# Altium PCB Ender-3.PcbDoc (part 6 of 14)
Units mil, origin at the board's own origin, x right, y up, seen from the top; angles counter-clockwise.
Board outline 3970.48 x 2769.68 mil, 2 copper layers (TopLayer, BottomLayer); 146 components, 136 nets, 669 pads, 614 vias.
Unrouted connection lines stored in the file: 1.
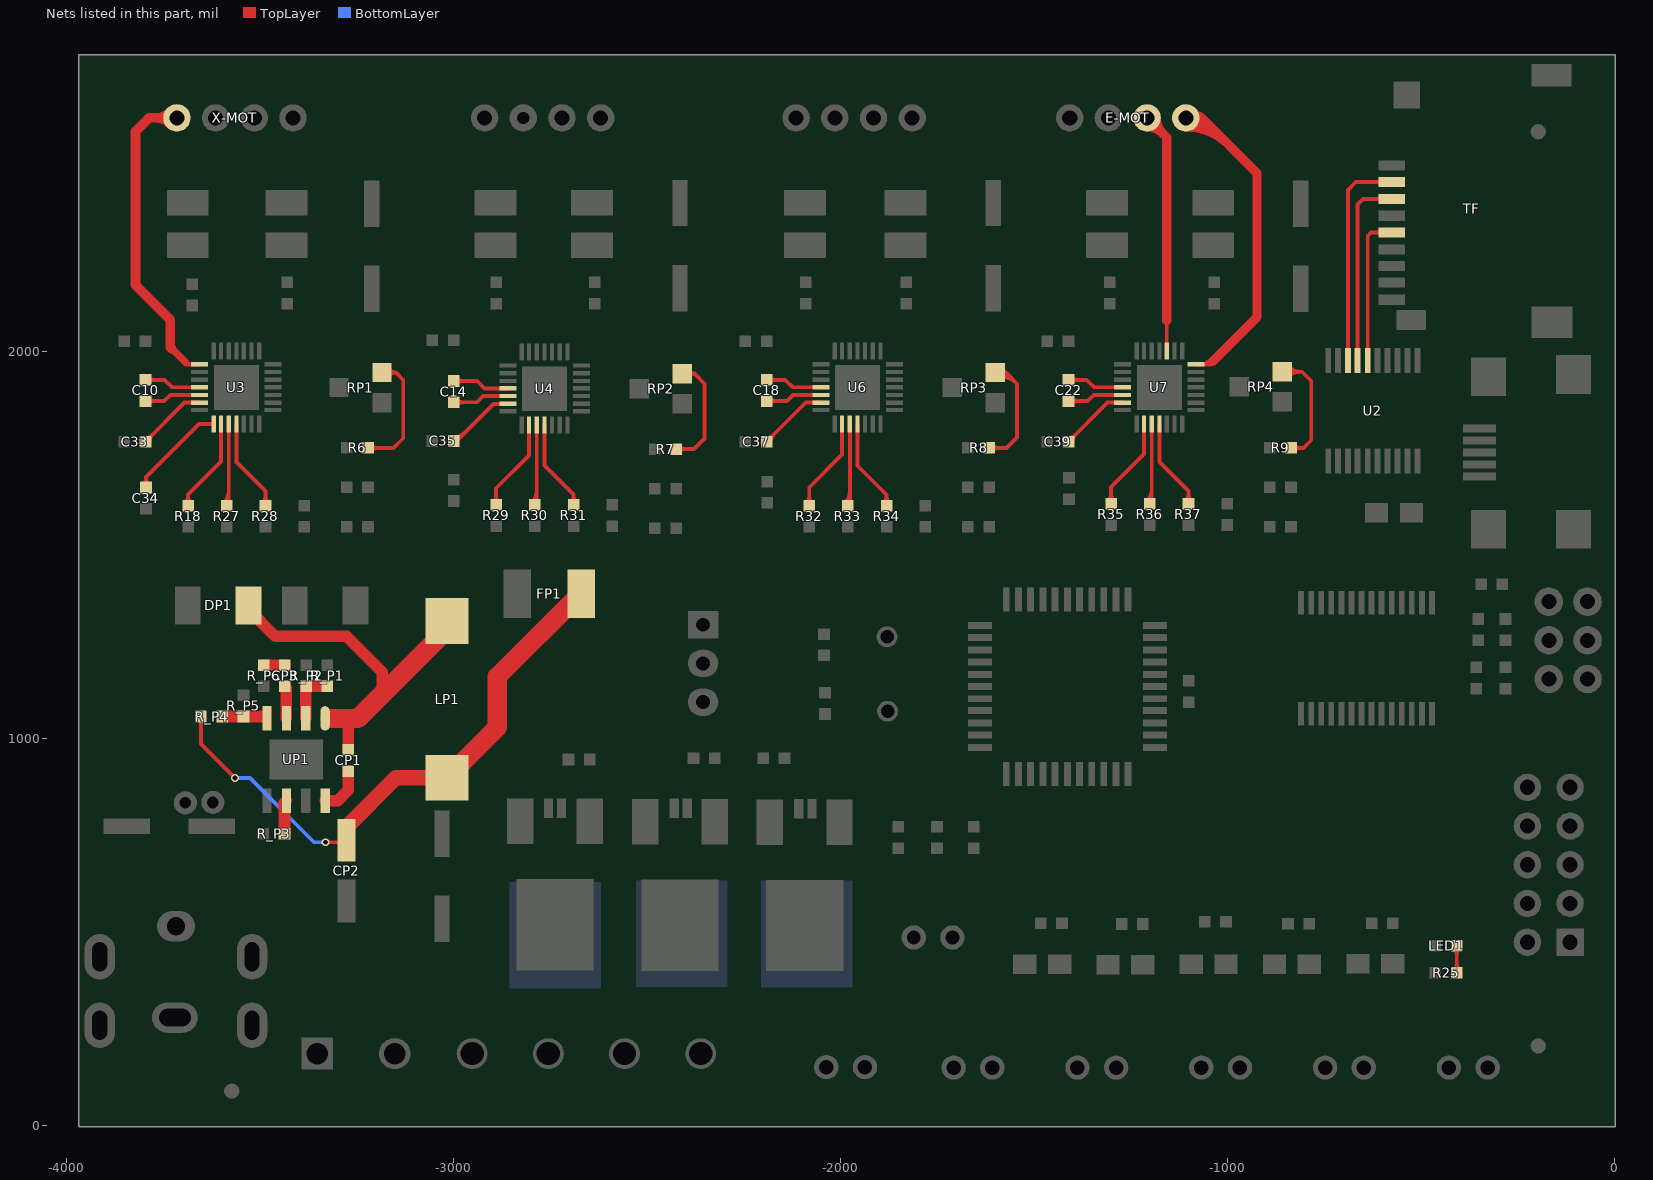
[diagram p6: the nets of this part, all layers, seen from the top]

## Via types
v1: diameter 28, hole 18, TopLayer to BottomLayer, tented both sides, 246 vias
v2: diameter 27.56, hole 19.68, TopLayer to BottomLayer, tented both sides, 196 vias
v3: diameter 20, hole 12, TopLayer to BottomLayer, tented both sides, 124 vias
v4: diameter 27.56, hole 11.81, TopLayer to BottomLayer, tented bottom, 16 vias
v5: diameter 27.56, hole 19.68, TopLayer to BottomLayer, 16 vias
v6: diameter 20, hole 12, TopLayer to BottomLayer, 12 vias
v7: diameter 28, hole 11.81, TopLayer to BottomLayer, tented both sides, 4 vias

## Nets (pads, with @x,y where several pads share a name; then routed paths per layer and width w, separated by ;. In a path a pad name is that pad's centre, name@x,y a point inside that pad or via, vN(x,y) a via of type N, cw(c..) or ccw(c..) an arc to the next point about the centre after c; other vN are vias at no path point) (continued)
NetC10_1: C10.1 U3.4 | length 489.2
  TopLayer w10: C10.1@-3795.62,1927.88 -3746.54,1927.88 -3727.54,1908.88 U3.4@-3655.62,1908.88 ; C10.1@-3788.55,1920.81 cw(c-3771.48,1903.74) -3771.48,1927.88 ; C10.1@-3788.55,1920.81 cw(c-3771.48,1903.74) -3771.48,1927.88 ; C10.1@-3788.55,1920.81 cw(c-3771.48,1903.74) -3771.48,1927.88 ; C10.1@-3788.55,1920.81 cw(c-3771.48,1903.74) -3771.48,1927.88 ; C10.1@-3788.55,1920.81 cw(c-3771.48,1903.74) -3771.48,1927.88 ; C10.1@-3788.55,1920.81 cw(c-3771.48,1903.74) -3771.48,1927.88 ; C10.1@-3788.55,1920.81 cw(c-3771.48,1903.74) -3771.48,1927.88 ; C10.1@-3788.55,1920.81 cw(c-3771.48,1903.74) -3771.48,1927.88 ; C10.1@-3788.55,1920.81 cw(c-3771.48,1903.74) -3771.48,1927.88 ; C10.1@-3788.55,1934.95 ccw(c-3771.48,1952.02) -3771.48,1927.88 ; C10.1@-3788.55,1934.95 ccw(c-3771.48,1952.02) -3771.48,1927.88 ; C10.1@-3788.55,1934.95 ccw(c-3771.48,1952.02) -3771.48,1927.88 ; C10.1@-3788.55,1934.95 ccw(c-3771.48,1952.02) -3771.48,1927.88 ; C10.1@-3788.55,1934.95 ccw(c-3771.48,1952.02) -3771.48,1927.88 ; C10.1@-3788.55,1934.95 ccw(c-3771.48,1952.02) -3771.48,1927.88 ; C10.1@-3788.55,1934.95 ccw(c-3771.48,1952.02) -3771.48,1927.88 ; C10.1@-3788.55,1934.95 ccw(c-3771.48,1952.02) -3771.48,1927.88 ; C10.1@-3788.55,1934.95 ccw(c-3771.48,1952.02) -3771.48,1927.88
NetC10_2: C10.2 U3.5 | length 487.9
  TopLayer w10: C10.2@-3795.62,1872.88 -3747.54,1872.88 -3731.54,1888.88 U3.5@-3655.62,1888.88 ; C10.2@-3788.55,1865.81 cw(c-3771.48,1848.74) -3771.48,1872.88 ; C10.2@-3788.55,1865.81 cw(c-3771.48,1848.74) -3771.48,1872.88 ; C10.2@-3788.55,1865.81 cw(c-3771.48,1848.74) -3771.48,1872.88 ; C10.2@-3788.55,1865.81 cw(c-3771.48,1848.74) -3771.48,1872.88 ; C10.2@-3788.55,1865.81 cw(c-3771.48,1848.74) -3771.48,1872.88 ; C10.2@-3788.55,1865.81 cw(c-3771.48,1848.74) -3771.48,1872.88 ; C10.2@-3788.55,1865.81 cw(c-3771.48,1848.74) -3771.48,1872.88 ; C10.2@-3788.55,1865.81 cw(c-3771.48,1848.74) -3771.48,1872.88 ; C10.2@-3788.55,1865.81 cw(c-3771.48,1848.74) -3771.48,1872.88 ; C10.2@-3788.55,1879.95 ccw(c-3771.48,1897.02) -3771.48,1872.88 ; C10.2@-3788.55,1879.95 ccw(c-3771.48,1897.02) -3771.48,1872.88 ; C10.2@-3788.55,1879.95 ccw(c-3771.48,1897.02) -3771.48,1872.88 ; C10.2@-3788.55,1879.95 ccw(c-3771.48,1897.02) -3771.48,1872.88 ; C10.2@-3788.55,1879.95 ccw(c-3771.48,1897.02) -3771.48,1872.88 ; C10.2@-3788.55,1879.95 ccw(c-3771.48,1897.02) -3771.48,1872.88 ; C10.2@-3788.55,1879.95 ccw(c-3771.48,1897.02) -3771.48,1872.88 ; C10.2@-3788.55,1879.95 ccw(c-3771.48,1897.02) -3771.48,1872.88 ; C10.2@-3788.55,1879.95 ccw(c-3771.48,1897.02) -3771.48,1872.88
NetC14_1: C14.1 U4.4 | length 489.2
  TopLayer w10: C14.1@-2999.54,1924.84 -2938.54,1924.84 -2919.54,1905.84 U4.4@-2859.54,1905.84 ; C14.1@-2992.46,1917.77 cw(c-2975.39,1900.7) -2975.39,1924.84 ; C14.1@-2992.46,1917.77 cw(c-2975.39,1900.7) -2975.39,1924.84 ; C14.1@-2992.46,1917.77 cw(c-2975.39,1900.7) -2975.39,1924.84 ; C14.1@-2992.46,1917.77 cw(c-2975.39,1900.7) -2975.39,1924.84 ; C14.1@-2992.46,1917.77 cw(c-2975.39,1900.7) -2975.39,1924.84 ; C14.1@-2992.46,1917.77 cw(c-2975.39,1900.7) -2975.39,1924.84 ; C14.1@-2992.46,1917.77 cw(c-2975.39,1900.7) -2975.39,1924.84 ; C14.1@-2992.46,1917.77 cw(c-2975.39,1900.7) -2975.39,1924.84 ; C14.1@-2992.46,1917.77 cw(c-2975.39,1900.7) -2975.39,1924.84 ; C14.1@-2992.46,1931.91 ccw(c-2975.39,1948.98) -2975.39,1924.84 ; C14.1@-2992.46,1931.91 ccw(c-2975.39,1948.98) -2975.39,1924.84 ; C14.1@-2992.46,1931.91 ccw(c-2975.39,1948.98) -2975.39,1924.84 ; C14.1@-2992.46,1931.91 ccw(c-2975.39,1948.98) -2975.39,1924.84 ; C14.1@-2992.46,1931.91 ccw(c-2975.39,1948.98) -2975.39,1924.84 ; C14.1@-2992.46,1931.91 ccw(c-2975.39,1948.98) -2975.39,1924.84 ; C14.1@-2992.46,1931.91 ccw(c-2975.39,1948.98) -2975.39,1924.84 ; C14.1@-2992.46,1931.91 ccw(c-2975.39,1948.98) -2975.39,1924.84 ; C14.1@-2992.46,1931.91 ccw(c-2975.39,1948.98) -2975.39,1924.84
NetC14_2: C14.2 U4.5 | length 487.9
  TopLayer w10: C14.2@-2999.54,1869.84 -2939.54,1869.84 -2923.54,1885.84 U4.5@-2859.54,1885.84 ; C14.2@-2992.46,1862.77 cw(c-2975.39,1845.7) -2975.39,1869.84 ; C14.2@-2992.46,1862.77 cw(c-2975.39,1845.7) -2975.39,1869.84 ; C14.2@-2992.46,1862.77 cw(c-2975.39,1845.7) -2975.39,1869.84 ; C14.2@-2992.46,1862.77 cw(c-2975.39,1845.7) -2975.39,1869.84 ; C14.2@-2992.46,1862.77 cw(c-2975.39,1845.7) -2975.39,1869.84 ; C14.2@-2992.46,1862.77 cw(c-2975.39,1845.7) -2975.39,1869.84 ; C14.2@-2992.46,1862.77 cw(c-2975.39,1845.7) -2975.39,1869.84 ; C14.2@-2992.46,1862.77 cw(c-2975.39,1845.7) -2975.39,1869.84 ; C14.2@-2992.46,1862.77 cw(c-2975.39,1845.7) -2975.39,1869.84 ; C14.2@-2992.46,1876.91 ccw(c-2975.39,1893.98) -2975.39,1869.84 ; C14.2@-2992.46,1876.91 ccw(c-2975.39,1893.98) -2975.39,1869.84 ; C14.2@-2992.46,1876.91 ccw(c-2975.39,1893.98) -2975.39,1869.84 ; C14.2@-2992.46,1876.91 ccw(c-2975.39,1893.98) -2975.39,1869.84 ; C14.2@-2992.46,1876.91 ccw(c-2975.39,1893.98) -2975.39,1869.84 ; C14.2@-2992.46,1876.91 ccw(c-2975.39,1893.98) -2975.39,1869.84 ; C14.2@-2992.46,1876.91 ccw(c-2975.39,1893.98) -2975.39,1869.84 ; C14.2@-2992.46,1876.91 ccw(c-2975.39,1893.98) -2975.39,1869.84 ; C14.2@-2992.46,1876.91 ccw(c-2975.39,1893.98) -2975.39,1869.84
NetC18_1: C18.1 U6.4 | length 489.2
  TopLayer w10: C18.1@-2190.62,1927.88 -2142.57,1927.88 -2123.57,1908.88 U6.4@-2050.62,1908.88 ; C18.1@-2183.55,1920.81 cw(c-2166.48,1903.74) -2166.48,1927.88 ; C18.1@-2183.55,1920.81 cw(c-2166.48,1903.74) -2166.48,1927.88 ; C18.1@-2183.55,1920.81 cw(c-2166.48,1903.74) -2166.48,1927.88 ; C18.1@-2183.55,1920.81 cw(c-2166.48,1903.74) -2166.48,1927.88 ; C18.1@-2183.55,1920.81 cw(c-2166.48,1903.74) -2166.48,1927.88 ; C18.1@-2183.55,1920.81 cw(c-2166.48,1903.74) -2166.48,1927.88 ; C18.1@-2183.55,1920.81 cw(c-2166.48,1903.74) -2166.48,1927.88 ; C18.1@-2183.55,1920.81 cw(c-2166.48,1903.74) -2166.48,1927.88 ; C18.1@-2183.55,1920.81 cw(c-2166.48,1903.74) -2166.48,1927.88 ; C18.1@-2183.55,1934.95 ccw(c-2166.48,1952.02) -2166.48,1927.88 ; C18.1@-2183.55,1934.95 ccw(c-2166.48,1952.02) -2166.48,1927.88 ; C18.1@-2183.55,1934.95 ccw(c-2166.48,1952.02) -2166.48,1927.88 ; C18.1@-2183.55,1934.95 ccw(c-2166.48,1952.02) -2166.48,1927.88 ; C18.1@-2183.55,1934.95 ccw(c-2166.48,1952.02) -2166.48,1927.88 ; C18.1@-2183.55,1934.95 ccw(c-2166.48,1952.02) -2166.48,1927.88 ; C18.1@-2183.55,1934.95 ccw(c-2166.48,1952.02) -2166.48,1927.88 ; C18.1@-2183.55,1934.95 ccw(c-2166.48,1952.02) -2166.48,1927.88 ; C18.1@-2183.55,1934.95 ccw(c-2166.48,1952.02) -2166.48,1927.88
NetC18_2: C18.2 U6.5 | length 487.9
  TopLayer w10: C18.2@-2190.62,1872.88 -2138.5,1872.88 -2122.5,1888.88 U6.5@-2050.62,1888.88 ; C18.2@-2183.55,1865.81 cw(c-2166.48,1848.74) -2166.48,1872.88 ; C18.2@-2183.55,1865.81 cw(c-2166.48,1848.74) -2166.48,1872.88 ; C18.2@-2183.55,1865.81 cw(c-2166.48,1848.74) -2166.48,1872.88 ; C18.2@-2183.55,1865.81 cw(c-2166.48,1848.74) -2166.48,1872.88 ; C18.2@-2183.55,1865.81 cw(c-2166.48,1848.74) -2166.48,1872.88 ; C18.2@-2183.55,1865.81 cw(c-2166.48,1848.74) -2166.48,1872.88 ; C18.2@-2183.55,1865.81 cw(c-2166.48,1848.74) -2166.48,1872.88 ; C18.2@-2183.55,1865.81 cw(c-2166.48,1848.74) -2166.48,1872.88 ; C18.2@-2183.55,1865.81 cw(c-2166.48,1848.74) -2166.48,1872.88 ; C18.2@-2183.55,1879.95 ccw(c-2166.48,1897.02) -2166.48,1872.88 ; C18.2@-2183.55,1879.95 ccw(c-2166.48,1897.02) -2166.48,1872.88 ; C18.2@-2183.55,1879.95 ccw(c-2166.48,1897.02) -2166.48,1872.88 ; C18.2@-2183.55,1879.95 ccw(c-2166.48,1897.02) -2166.48,1872.88 ; C18.2@-2183.55,1879.95 ccw(c-2166.48,1897.02) -2166.48,1872.88 ; C18.2@-2183.55,1879.95 ccw(c-2166.48,1897.02) -2166.48,1872.88 ; C18.2@-2183.55,1879.95 ccw(c-2166.48,1897.02) -2166.48,1872.88 ; C18.2@-2183.55,1879.95 ccw(c-2166.48,1897.02) -2166.48,1872.88 ; C18.2@-2183.55,1879.95 ccw(c-2166.48,1897.02) -2166.48,1872.88
NetC22_1: C22.1 U7.4 | length 489.2
  TopLayer w10: C22.1@-1410.62,1927.88 -1363.57,1927.88 -1344.57,1908.88 U7.4@-1270.62,1908.88 ; C22.1@-1403.55,1920.81 cw(c-1386.48,1903.74) -1386.48,1927.88 ; C22.1@-1403.55,1920.81 cw(c-1386.48,1903.74) -1386.48,1927.88 ; C22.1@-1403.55,1920.81 cw(c-1386.48,1903.74) -1386.48,1927.88 ; C22.1@-1403.55,1920.81 cw(c-1386.48,1903.74) -1386.48,1927.88 ; C22.1@-1403.55,1920.81 cw(c-1386.48,1903.74) -1386.48,1927.88 ; C22.1@-1403.55,1920.81 cw(c-1386.48,1903.74) -1386.48,1927.88 ; C22.1@-1403.55,1920.81 cw(c-1386.48,1903.74) -1386.48,1927.88 ; C22.1@-1403.55,1920.81 cw(c-1386.48,1903.74) -1386.48,1927.88 ; C22.1@-1403.55,1920.81 cw(c-1386.48,1903.74) -1386.48,1927.88 ; C22.1@-1403.55,1934.95 ccw(c-1386.48,1952.02) -1386.48,1927.88 ; C22.1@-1403.55,1934.95 ccw(c-1386.48,1952.02) -1386.48,1927.88 ; C22.1@-1403.55,1934.95 ccw(c-1386.48,1952.02) -1386.48,1927.88 ; C22.1@-1403.55,1934.95 ccw(c-1386.48,1952.02) -1386.48,1927.88 ; C22.1@-1403.55,1934.95 ccw(c-1386.48,1952.02) -1386.48,1927.88 ; C22.1@-1403.55,1934.95 ccw(c-1386.48,1952.02) -1386.48,1927.88 ; C22.1@-1403.55,1934.95 ccw(c-1386.48,1952.02) -1386.48,1927.88 ; C22.1@-1403.55,1934.95 ccw(c-1386.48,1952.02) -1386.48,1927.88 ; C22.1@-1403.55,1934.95 ccw(c-1386.48,1952.02) -1386.48,1927.88
NetC22_2: C22.2 U7.5 | length 487.9
  TopLayer w10: C22.2@-1410.62,1872.88 -1361.5,1872.88 -1345.5,1888.88 U7.5@-1270.62,1888.88 ; C22.2@-1403.55,1865.81 cw(c-1386.48,1848.74) -1386.48,1872.88 ; C22.2@-1403.55,1865.81 cw(c-1386.48,1848.74) -1386.48,1872.88 ; C22.2@-1403.55,1865.81 cw(c-1386.48,1848.74) -1386.48,1872.88 ; C22.2@-1403.55,1865.81 cw(c-1386.48,1848.74) -1386.48,1872.88 ; C22.2@-1403.55,1865.81 cw(c-1386.48,1848.74) -1386.48,1872.88 ; C22.2@-1403.55,1865.81 cw(c-1386.48,1848.74) -1386.48,1872.88 ; C22.2@-1403.55,1865.81 cw(c-1386.48,1848.74) -1386.48,1872.88 ; C22.2@-1403.55,1865.81 cw(c-1386.48,1848.74) -1386.48,1872.88 ; C22.2@-1403.55,1865.81 cw(c-1386.48,1848.74) -1386.48,1872.88 ; C22.2@-1403.55,1879.95 ccw(c-1386.48,1897.02) -1386.48,1872.88 ; C22.2@-1403.55,1879.95 ccw(c-1386.48,1897.02) -1386.48,1872.88 ; C22.2@-1403.55,1879.95 ccw(c-1386.48,1897.02) -1386.48,1872.88 ; C22.2@-1403.55,1879.95 ccw(c-1386.48,1897.02) -1386.48,1872.88 ; C22.2@-1403.55,1879.95 ccw(c-1386.48,1897.02) -1386.48,1872.88 ; C22.2@-1403.55,1879.95 ccw(c-1386.48,1897.02) -1386.48,1872.88 ; C22.2@-1403.55,1879.95 ccw(c-1386.48,1897.02) -1386.48,1872.88 ; C22.2@-1403.55,1879.95 ccw(c-1386.48,1897.02) -1386.48,1872.88 ; C22.2@-1403.55,1879.95 ccw(c-1386.48,1897.02) -1386.48,1872.88
NetC32_2: 
NetC33_1: C33.1 U3.6 | length 525.1
  TopLayer w10: C33.1@-3793.62,1767.88 C33.1@-3795.62,1767.88 -3694.62,1868.88 U3.6@-3655.62,1868.88 ; C33.1@-3795.62,1777.88 ccw(c-3795.62,1802.02) -3778.55,1784.95 ; C33.1@-3795.62,1777.88 ccw(c-3795.62,1802.02) -3778.55,1784.95 ; C33.1@-3795.62,1777.88 ccw(c-3795.62,1802.02) -3778.55,1784.95 ; C33.1@-3795.62,1777.88 ccw(c-3795.62,1802.02) -3778.55,1784.95 ; C33.1@-3795.62,1777.88 ccw(c-3795.62,1802.02) -3778.55,1784.95 ; C33.1@-3795.62,1777.88 ccw(c-3795.62,1802.02) -3778.55,1784.95 ; C33.1@-3795.62,1777.88 ccw(c-3795.62,1802.02) -3778.55,1784.95 ; C33.1@-3795.62,1777.88 ccw(c-3795.62,1802.02) -3778.55,1784.95 ; C33.1@-3795.62,1777.88 ccw(c-3795.62,1802.02) -3778.55,1784.95 ; C33.1@-3785.62,1767.88 cw(c-3761.48,1767.88) -3778.55,1784.95 ; C33.1@-3785.62,1767.88 cw(c-3761.48,1767.88) -3778.55,1784.95 ; C33.1@-3785.62,1767.88 cw(c-3761.48,1767.88) -3778.55,1784.95 ; C33.1@-3785.62,1767.88 cw(c-3761.48,1767.88) -3778.55,1784.95 ; C33.1@-3785.62,1767.88 cw(c-3761.48,1767.88) -3778.55,1784.95 ; C33.1@-3785.62,1767.88 cw(c-3761.48,1767.88) -3778.55,1784.95 ; C33.1@-3785.62,1767.88 cw(c-3761.48,1767.88) -3778.55,1784.95 ; C33.1@-3785.62,1767.88 cw(c-3761.48,1767.88) -3778.55,1784.95 ; C33.1@-3785.62,1767.88 cw(c-3761.48,1767.88) -3778.55,1784.95
NetC35_1: C35.1 U4.6 | length 469.9
  TopLayer w10: C35.1@-2999.54,1769.84 -2992.54,1769.84 -2896.54,1865.84 U4.6@-2859.54,1865.84 ; C35.1@-2999.54,1779.84 ccw(c-2999.54,1820.88) -2970.51,1791.86 ; C35.1@-2999.54,1779.84 ccw(c-2999.54,1820.88) -2970.51,1791.86 ; C35.1@-2999.54,1779.84 ccw(c-2999.54,1820.88) -2970.51,1791.86 ; C35.1@-2999.54,1779.84 ccw(c-2999.54,1820.88) -2970.51,1791.86 ; C35.1@-2999.54,1779.84 ccw(c-2999.54,1820.88) -2970.51,1791.86 ; C35.1@-2999.54,1779.84 ccw(c-2999.54,1820.88) -2970.51,1791.86 ; C35.1@-2999.54,1779.84 ccw(c-2999.54,1820.88) -2970.51,1791.86 ; C35.1@-2999.54,1779.84 ccw(c-2999.54,1820.88) -2970.51,1791.86 ; C35.1@-2999.54,1779.84 ccw(c-2999.54,1820.88) -2970.51,1791.86
NetC37_1: C37.1 U6.6 | length 523.1
  TopLayer w10: C37.1@-2190.62,1767.88 -2089.62,1868.88 U6.6@-2050.62,1868.88 ; C37.1@-2190.62,1777.88 ccw(c-2190.62,1802.02) -2173.55,1784.95 ; C37.1@-2190.62,1777.88 ccw(c-2190.62,1802.02) -2173.55,1784.95 ; C37.1@-2190.62,1777.88 ccw(c-2190.62,1802.02) -2173.55,1784.95 ; C37.1@-2190.62,1777.88 ccw(c-2190.62,1802.02) -2173.55,1784.95 ; C37.1@-2190.62,1777.88 ccw(c-2190.62,1802.02) -2173.55,1784.95 ; C37.1@-2190.62,1777.88 ccw(c-2190.62,1802.02) -2173.55,1784.95 ; C37.1@-2190.62,1777.88 ccw(c-2190.62,1802.02) -2173.55,1784.95 ; C37.1@-2190.62,1777.88 ccw(c-2190.62,1802.02) -2173.55,1784.95 ; C37.1@-2190.62,1777.88 ccw(c-2190.62,1802.02) -2173.55,1784.95 ; C37.1@-2180.62,1767.88 cw(c-2156.48,1767.88) -2173.55,1784.95 ; C37.1@-2180.62,1767.88 cw(c-2156.48,1767.88) -2173.55,1784.95 ; C37.1@-2180.62,1767.88 cw(c-2156.48,1767.88) -2173.55,1784.95 ; C37.1@-2180.62,1767.88 cw(c-2156.48,1767.88) -2173.55,1784.95 ; C37.1@-2180.62,1767.88 cw(c-2156.48,1767.88) -2173.55,1784.95 ; C37.1@-2180.62,1767.88 cw(c-2156.48,1767.88) -2173.55,1784.95 ; C37.1@-2180.62,1767.88 cw(c-2156.48,1767.88) -2173.55,1784.95 ; C37.1@-2180.62,1767.88 cw(c-2156.48,1767.88) -2173.55,1784.95 ; C37.1@-2180.62,1767.88 cw(c-2156.48,1767.88) -2173.55,1784.95
NetC39_1: C39.1 U7.6 | length 523.1
  TopLayer w10: C39.1@-1410.62,1767.88 -1309.62,1868.88 U7.6@-1270.62,1868.88 ; C39.1@-1410.62,1777.88 ccw(c-1410.62,1802.02) -1393.55,1784.95 ; C39.1@-1410.62,1777.88 ccw(c-1410.62,1802.02) -1393.55,1784.95 ; C39.1@-1410.62,1777.88 ccw(c-1410.62,1802.02) -1393.55,1784.95 ; C39.1@-1410.62,1777.88 ccw(c-1410.62,1802.02) -1393.55,1784.95 ; C39.1@-1410.62,1777.88 ccw(c-1410.62,1802.02) -1393.55,1784.95 ; C39.1@-1410.62,1777.88 ccw(c-1410.62,1802.02) -1393.55,1784.95 ; C39.1@-1410.62,1777.88 ccw(c-1410.62,1802.02) -1393.55,1784.95 ; C39.1@-1410.62,1777.88 ccw(c-1410.62,1802.02) -1393.55,1784.95 ; C39.1@-1410.62,1777.88 ccw(c-1410.62,1802.02) -1393.55,1784.95 ; C39.1@-1400.62,1767.88 cw(c-1376.48,1767.88) -1393.55,1784.95 ; C39.1@-1400.62,1767.88 cw(c-1376.48,1767.88) -1393.55,1784.95 ; C39.1@-1400.62,1767.88 cw(c-1376.48,1767.88) -1393.55,1784.95 ; C39.1@-1400.62,1767.88 cw(c-1376.48,1767.88) -1393.55,1784.95 ; C39.1@-1400.62,1767.88 cw(c-1376.48,1767.88) -1393.55,1784.95 ; C39.1@-1400.62,1767.88 cw(c-1376.48,1767.88) -1393.55,1784.95 ; C39.1@-1400.62,1767.88 cw(c-1376.48,1767.88) -1393.55,1784.95 ; C39.1@-1400.62,1767.88 cw(c-1376.48,1767.88) -1393.55,1784.95 ; C39.1@-1400.62,1767.88 cw(c-1376.48,1767.88) -1393.55,1784.95
NetCP1_1: CP1.1 UP1.8 | length 120.3
  TopLayer w30: UP1.8@-3331.54,840.54 -3298.83,840.54 -3271.54,867.84 CP1.1@-3271.54,916.84
NetCP1_2: CP1.2 DP1.2 LP1.2 UP1.1 | length 969.9
  TopLayer w30: DP1.2@-3529.06,1344.84 -3529.06,1333.36 -3460.54,1264.84 -3275.54,1264.84 -3183.54,1172.84 -3183.54,1115.84 ; CP1.2@-3271.54,971.84 -3271.54,1041.84
  TopLayer w50: -3318.54,1052.84 -3246.54,1052.84 -3183.54,1115.84 -3016.54,1282.84 LP1.2@-3016.54,1304.96
NetCP2_1: CP2.1 FP1.1 LP1.1 R_P4.2 | length 1512.6
  TopLayer w10: R_P4.2@-3652.54,1057.84 -3652.54,986.84 v3(-3564.54,898.84) ; v3(-3330.54,732.84) CP2.1@-3282.28,732.84
  TopLayer w40: CP2.1@-3276.54,738.58 -3276.54,771.84 -3148.54,899.84 LP1.1@-3016.54,899.84
  TopLayer w50: LP1.1@-3016.54,899.84 -2886.54,1029.84 -2886.54,1160.46 -2672,1375 FP1.1@-2670,1375
  BottomLayer w10: v3(-3564.54,898.84) -3525.54,898.84 -3359.54,732.84 v3(-3330.54,732.84)
NetCP3_1: CP3.1 R_P6.1 | length 55
  TopLayer w30: R_P6.1@-3490.54,1190.84 CP3.1@-3435.54,1190.84
NetCP3_2: CP3.2 UP1.3 | length 78.7
  TopLayer w30: UP1.3@-3431.54,1053.14 CP3.2@-3431.54,1131.84
NetE-MOT_3: E-MOT.3 U7.24 | length 1056.2
  TopLayer w10: U7.24@-1156.62,2017.56 -1156.62,2080.84
  TopLayer w23.62: E-MOT.3@-1207.49,2604.84 -1156.62,2553.98 -1156.62,2442.84 -1156.62,2080.84 ; E-MOT.3@-1207.49,2581.22 cw(c-1207.49,2524.19) -1167.16,2564.52 ; E-MOT.3@-1207.49,2581.22 cw(c-1207.49,2524.19) -1167.16,2564.52 ; E-MOT.3@-1207.49,2581.22 cw(c-1207.49,2524.19) -1167.16,2564.52 ; E-MOT.3@-1207.49,2581.22 cw(c-1207.49,2524.19) -1167.16,2564.52 ; E-MOT.3@-1207.49,2581.22 cw(c-1207.49,2524.19) -1167.16,2564.52 ; E-MOT.3@-1183.87,2604.84 ccw(c-1126.84,2604.84) -1167.16,2564.52 ; E-MOT.3@-1183.87,2604.84 ccw(c-1126.84,2604.84) -1167.16,2564.52 ; E-MOT.3@-1183.87,2604.84 ccw(c-1126.84,2604.84) -1167.16,2564.52 ; E-MOT.3@-1183.87,2604.84 ccw(c-1126.84,2604.84) -1167.16,2564.52 ; E-MOT.3@-1183.87,2604.84 ccw(c-1126.84,2604.84) -1167.16,2564.52
NetE-MOT_4: E-MOT.4 U7.21 | length 2198.1
  TopLayer w10: U7.21@-1080.62,1967.88 -1044.54,1967.88 ccw(c-1045.02,1978.23) -1034.67,1978.71 ; -1056.54,1967.88 cw(c-1044.05,1962.36) -1038.54,1974.84
  TopLayer w23.62: E-MOT.4@-1092.47,2586.61 cw(c-1070.5,2559.93) -1046.06,2584.37 ; -1064.46,2602.77 ccw(c-1087.12,2580.11) E-MOT.4@-1107.49,2604.84 ; -1038.54,1974.84 -923.54,2089.84 -923.54,2413.84 -923.54,2461.84 -1066.54,2604.84 ; E-MOT.4@-1107.49,2581.22 cw(c-1107.49,2425.32) -997.25,2535.56 ; E-MOT.4@-1107.49,2581.22 cw(c-1107.49,2425.32) -997.25,2535.56 ; E-MOT.4@-1107.49,2581.22 cw(c-1107.49,2425.32) -997.25,2535.56 ; E-MOT.4@-1107.49,2581.22 cw(c-1107.49,2425.32) -997.25,2535.56 ; E-MOT.4@-1107.49,2581.22 cw(c-1107.49,2425.32) -997.25,2535.56 ; E-MOT.4@-1107.49,2604.84 cw(c-1107.49,2505.97) -1037.58,2575.88 ; E-MOT.4@-1107.49,2604.84 cw(c-1107.49,2505.97) -1037.58,2575.88 ; E-MOT.4@-1107.49,2604.84 cw(c-1107.49,2505.97) -1037.58,2575.88 ; E-MOT.4@-1107.49,2604.84 cw(c-1107.49,2505.97) -1037.58,2575.88 ; E-MOT.4@-1107.49,2604.84 cw(c-1107.49,2505.97) -1037.58,2575.88 ; E-MOT.4@-1107.49,2604.84 -1066.54,2604.84 ; E-MOT.4@-1087.04,2593.02 cw(c-1066.54,2581.16) -1066.54,2604.84 ; E-MOT.4@-1087.04,2593.02 cw(c-1066.54,2581.16) -1066.54,2604.84 ; E-MOT.4@-1087.04,2593.02 cw(c-1066.54,2581.16) -1066.54,2604.84 ; E-MOT.4@-1087.04,2593.02 cw(c-1066.54,2581.16) -1066.54,2604.84 ; E-MOT.4@-1087.04,2593.02 cw(c-1066.54,2581.16) -1066.54,2604.84 ; E-MOT.4@-1087.04,2616.67 ccw(c-1066.54,2628.53) -1066.54,2604.84 ; E-MOT.4@-1087.04,2616.67 ccw(c-1066.54,2628.53) -1066.54,2604.84 ; E-MOT.4@-1087.04,2616.67 ccw(c-1066.54,2628.53) -1066.54,2604.84 ; E-MOT.4@-1087.04,2616.67 ccw(c-1066.54,2628.53) -1066.54,2604.84 ; E-MOT.4@-1087.04,2616.67 ccw(c-1066.54,2628.53) -1066.54,2604.84
NetL1_2: LED1.2 R25.1 | length 221.7
  TopLayer w10: R25.1@-407.54,395.84 LED1.2@-407.54,465.84 ; -407.54,419.98 cw(c-431.68,419.98) -414.61,402.91 ccw(c-431.68,419.98) -407.54,419.98 ; -407.54,419.98 ccw(c-383.39,419.98) -400.46,402.91 cw(c-383.39,419.98) -407.54,419.98 ; -407.54,441.7 cw(c-383.39,441.7) -400.46,458.77 ccw(c-383.39,441.7) -407.54,441.7 ; -407.54,441.7 ccw(c-431.68,441.7) -414.61,458.77 cw(c-431.68,441.7) -407.54,441.7
NetR18_1: R18.1 U3.9 | length 576
  TopLayer w10: R18.1@-3685.62,1602.88 -3685.62,1631.76 -3600.62,1716.76 -3600.62,1776.88 ; U3.9@-3600.62,1795.97 -3600.62,1776.97 -3600.54,1776.88 ; U3.9@-3600.62,1813.88 -3600.62,1807.64 U3.9@-3600.54,1807.55 ; R18.1@-3692.69,1609.95 ccw(c-3709.76,1627.02) -3685.62,1627.02 ; R18.1@-3692.69,1609.95 ccw(c-3709.76,1627.02) -3685.62,1627.02 ; R18.1@-3692.69,1609.95 ccw(c-3709.76,1627.02) -3685.62,1627.02 ; R18.1@-3692.69,1609.95 ccw(c-3709.76,1627.02) -3685.62,1627.02 ; R18.1@-3692.69,1609.95 ccw(c-3709.76,1627.02) -3685.62,1627.02 ; R18.1@-3692.69,1609.95 ccw(c-3709.76,1627.02) -3685.62,1627.02 ; R18.1@-3692.69,1609.95 ccw(c-3709.76,1627.02) -3685.62,1627.02 ; R18.1@-3692.69,1609.95 ccw(c-3709.76,1627.02) -3685.62,1627.02 ; R18.1@-3692.69,1609.95 ccw(c-3709.76,1627.02) -3685.62,1627.02 ; -3685.62,1627.02 ccw(c-3661.48,1627.02) R18.1@-3678.55,1609.95 ; -3685.62,1627.02 ccw(c-3661.48,1627.02) R18.1@-3678.55,1609.95 ; -3685.62,1627.02 ccw(c-3661.48,1627.02) R18.1@-3678.55,1609.95 ; -3685.62,1627.02 ccw(c-3661.48,1627.02) R18.1@-3678.55,1609.95 ; -3685.62,1627.02 ccw(c-3661.48,1627.02) R18.1@-3678.55,1609.95 ; -3685.62,1627.02 ccw(c-3661.48,1627.02) R18.1@-3678.55,1609.95 ; -3685.62,1627.02 ccw(c-3661.48,1627.02) R18.1@-3678.55,1609.95 ; -3685.62,1627.02 ccw(c-3661.48,1627.02) R18.1@-3678.55,1609.95 ; -3685.62,1627.02 ccw(c-3661.48,1627.02) R18.1@-3678.55,1609.95
NetR27_1: R27.1 U3.10 | length 504.4
  TopLayer w10: R27.1@-3585.62,1602.88 -3580.62,1607.88 U3.10@-3580.62,1813.88 ; R27.1@-3592.69,1609.95 ccw(c-3621.84,1639.09) -3580.62,1639.09 ; R27.1@-3592.69,1609.95 ccw(c-3621.84,1639.09) -3580.62,1639.09 ; R27.1@-3592.69,1609.95 ccw(c-3621.84,1639.09) -3580.62,1639.09 ; R27.1@-3592.69,1609.95 ccw(c-3621.84,1639.09) -3580.62,1639.09 ; R27.1@-3592.69,1609.95 ccw(c-3621.84,1639.09) -3580.62,1639.09 ; R27.1@-3592.69,1609.95 ccw(c-3621.84,1639.09) -3580.62,1639.09 ; R27.1@-3592.69,1609.95 ccw(c-3621.84,1639.09) -3580.62,1639.09 ; R27.1@-3592.69,1609.95 ccw(c-3621.84,1639.09) -3580.62,1639.09 ; R27.1@-3592.69,1609.95 ccw(c-3621.84,1639.09) -3580.62,1639.09
NetR28_1: R28.1 U3.11 | length 583.4
  TopLayer w10: U3.11@-3560.62,1813.88 -3560.62,1715.84 -3485.62,1640.84 R28.1@-3485.62,1602.88 ; R28.1@-3492.69,1609.95 ccw(c-3509.76,1627.02) -3485.62,1627.02 ; R28.1@-3492.69,1609.95 ccw(c-3509.76,1627.02) -3485.62,1627.02 ; R28.1@-3492.69,1609.95 ccw(c-3509.76,1627.02) -3485.62,1627.02 ; R28.1@-3492.69,1609.95 ccw(c-3509.76,1627.02) -3485.62,1627.02 ; R28.1@-3492.69,1609.95 ccw(c-3509.76,1627.02) -3485.62,1627.02 ; R28.1@-3492.69,1609.95 ccw(c-3509.76,1627.02) -3485.62,1627.02 ; R28.1@-3492.69,1609.95 ccw(c-3509.76,1627.02) -3485.62,1627.02 ; R28.1@-3492.69,1609.95 ccw(c-3509.76,1627.02) -3485.62,1627.02 ; R28.1@-3492.69,1609.95 ccw(c-3509.76,1627.02) -3485.62,1627.02 ; -3485.62,1627.02 ccw(c-3461.48,1627.02) R28.1@-3478.55,1609.95 ; -3485.62,1627.02 ccw(c-3461.48,1627.02) R28.1@-3478.55,1609.95 ; -3485.62,1627.02 ccw(c-3461.48,1627.02) R28.1@-3478.55,1609.95 ; -3485.62,1627.02 ccw(c-3461.48,1627.02) R28.1@-3478.55,1609.95 ; -3485.62,1627.02 ccw(c-3461.48,1627.02) R28.1@-3478.55,1609.95 ; -3485.62,1627.02 ccw(c-3461.48,1627.02) R28.1@-3478.55,1609.95 ; -3485.62,1627.02 ccw(c-3461.48,1627.02) R28.1@-3478.55,1609.95 ; -3485.62,1627.02 ccw(c-3461.48,1627.02) R28.1@-3478.55,1609.95 ; -3485.62,1627.02 ccw(c-3461.48,1627.02) R28.1@-3478.55,1609.95
NetR29_1: R29.1 U4.9 | length 582.5
  TopLayer w10: R29.1@-2889.54,1604.84 -2889.54,1647.84 -2804.54,1732.84 U4.9@-2804.54,1810.84 ; R29.1@-2896.61,1611.91 ccw(c-2913.68,1628.98) -2889.54,1628.98 ; R29.1@-2896.61,1611.91 ccw(c-2913.68,1628.98) -2889.54,1628.98 ; R29.1@-2896.61,1611.91 ccw(c-2913.68,1628.98) -2889.54,1628.98 ; R29.1@-2896.61,1611.91 ccw(c-2913.68,1628.98) -2889.54,1628.98 ; R29.1@-2896.61,1611.91 ccw(c-2913.68,1628.98) -2889.54,1628.98 ; R29.1@-2896.61,1611.91 ccw(c-2913.68,1628.98) -2889.54,1628.98 ; R29.1@-2896.61,1611.91 ccw(c-2913.68,1628.98) -2889.54,1628.98 ; R29.1@-2896.61,1611.91 ccw(c-2913.68,1628.98) -2889.54,1628.98 ; R29.1@-2896.61,1611.91 ccw(c-2913.68,1628.98) -2889.54,1628.98 ; -2889.54,1628.98 ccw(c-2865.39,1628.98) R29.1@-2882.46,1611.91 ; -2889.54,1628.98 ccw(c-2865.39,1628.98) R29.1@-2882.46,1611.91 ; -2889.54,1628.98 ccw(c-2865.39,1628.98) R29.1@-2882.46,1611.91 ; -2889.54,1628.98 ccw(c-2865.39,1628.98) R29.1@-2882.46,1611.91 ; -2889.54,1628.98 ccw(c-2865.39,1628.98) R29.1@-2882.46,1611.91 ; -2889.54,1628.98 ccw(c-2865.39,1628.98) R29.1@-2882.46,1611.91 ; -2889.54,1628.98 ccw(c-2865.39,1628.98) R29.1@-2882.46,1611.91 ; -2889.54,1628.98 ccw(c-2865.39,1628.98) R29.1@-2882.46,1611.91 ; -2889.54,1628.98 ccw(c-2865.39,1628.98) R29.1@-2882.46,1611.91
NetR30_1: R30.1 U4.10 | length 499.4
  TopLayer w10: R30.1@-2789.54,1604.84 -2784.54,1609.84 U4.10@-2784.54,1810.84 ; R30.1@-2796.61,1611.91 ccw(c-2825.75,1641.06) -2784.54,1641.06 ; R30.1@-2796.61,1611.91 ccw(c-2825.75,1641.06) -2784.54,1641.06 ; R30.1@-2796.61,1611.91 ccw(c-2825.75,1641.06) -2784.54,1641.06 ; R30.1@-2796.61,1611.91 ccw(c-2825.75,1641.06) -2784.54,1641.06 ; R30.1@-2796.61,1611.91 ccw(c-2825.75,1641.06) -2784.54,1641.06 ; R30.1@-2796.61,1611.91 ccw(c-2825.75,1641.06) -2784.54,1641.06 ; R30.1@-2796.61,1611.91 ccw(c-2825.75,1641.06) -2784.54,1641.06 ; R30.1@-2796.61,1611.91 ccw(c-2825.75,1641.06) -2784.54,1641.06 ; R30.1@-2796.61,1611.91 ccw(c-2825.75,1641.06) -2784.54,1641.06
NetR31_1: R31.1 U4.11 | length 578.4
  TopLayer w10: U4.11@-2764.54,1810.84 -2764.54,1706.84 -2689.54,1631.84 R31.1@-2689.54,1604.84 ; R31.1@-2696.61,1611.91 ccw(c-2713.68,1628.98) -2689.54,1628.98 ; R31.1@-2696.61,1611.91 ccw(c-2713.68,1628.98) -2689.54,1628.98 ; R31.1@-2696.61,1611.91 ccw(c-2713.68,1628.98) -2689.54,1628.98 ; R31.1@-2696.61,1611.91 ccw(c-2713.68,1628.98) -2689.54,1628.98 ; R31.1@-2696.61,1611.91 ccw(c-2713.68,1628.98) -2689.54,1628.98 ; R31.1@-2696.61,1611.91 ccw(c-2713.68,1628.98) -2689.54,1628.98 ; R31.1@-2696.61,1611.91 ccw(c-2713.68,1628.98) -2689.54,1628.98 ; R31.1@-2696.61,1611.91 ccw(c-2713.68,1628.98) -2689.54,1628.98 ; R31.1@-2696.61,1611.91 ccw(c-2713.68,1628.98) -2689.54,1628.98 ; -2689.54,1628.98 ccw(c-2665.39,1628.98) R31.1@-2682.46,1611.91 ; -2689.54,1628.98 ccw(c-2665.39,1628.98) R31.1@-2682.46,1611.91 ; -2689.54,1628.98 ccw(c-2665.39,1628.98) R31.1@-2682.46,1611.91 ; -2689.54,1628.98 ccw(c-2665.39,1628.98) R31.1@-2682.46,1611.91 ; -2689.54,1628.98 ccw(c-2665.39,1628.98) R31.1@-2682.46,1611.91 ; -2689.54,1628.98 ccw(c-2665.39,1628.98) R31.1@-2682.46,1611.91 ; -2689.54,1628.98 ccw(c-2665.39,1628.98) R31.1@-2682.46,1611.91 ; -2689.54,1628.98 ccw(c-2665.39,1628.98) R31.1@-2682.46,1611.91 ; -2689.54,1628.98 ccw(c-2665.39,1628.98) R31.1@-2682.46,1611.91
NetR32_1: R32.1 U6.9 | length 587.5
  TopLayer w10: R32.1@-2080.62,1602.88 -2080.62,1649.76 -1995.62,1734.76 U6.9@-1995.62,1813.88 ; R32.1@-2087.69,1609.95 ccw(c-2104.76,1627.02) -2080.62,1627.02 ; R32.1@-2087.69,1609.95 ccw(c-2104.76,1627.02) -2080.62,1627.02 ; R32.1@-2087.69,1609.95 ccw(c-2104.76,1627.02) -2080.62,1627.02 ; R32.1@-2087.69,1609.95 ccw(c-2104.76,1627.02) -2080.62,1627.02 ; R32.1@-2087.69,1609.95 ccw(c-2104.76,1627.02) -2080.62,1627.02 ; R32.1@-2087.69,1609.95 ccw(c-2104.76,1627.02) -2080.62,1627.02 ; R32.1@-2087.69,1609.95 ccw(c-2104.76,1627.02) -2080.62,1627.02 ; R32.1@-2087.69,1609.95 ccw(c-2104.76,1627.02) -2080.62,1627.02 ; R32.1@-2087.69,1609.95 ccw(c-2104.76,1627.02) -2080.62,1627.02 ; -2080.62,1627.02 ccw(c-2056.48,1627.02) R32.1@-2073.55,1609.95 ; -2080.62,1627.02 ccw(c-2056.48,1627.02) R32.1@-2073.55,1609.95 ; -2080.62,1627.02 ccw(c-2056.48,1627.02) R32.1@-2073.55,1609.95 ; -2080.62,1627.02 ccw(c-2056.48,1627.02) R32.1@-2073.55,1609.95 ; -2080.62,1627.02 ccw(c-2056.48,1627.02) R32.1@-2073.55,1609.95 ; -2080.62,1627.02 ccw(c-2056.48,1627.02) R32.1@-2073.55,1609.95 ; -2080.62,1627.02 ccw(c-2056.48,1627.02) R32.1@-2073.55,1609.95 ; -2080.62,1627.02 ccw(c-2056.48,1627.02) R32.1@-2073.55,1609.95 ; -2080.62,1627.02 ccw(c-2056.48,1627.02) R32.1@-2073.55,1609.95
NetR33_1: R33.1 U6.10 | length 504.4
  TopLayer w10: R33.1@-1980.62,1602.88 -1975.62,1607.88 U6.10@-1975.62,1813.88 ; R33.1@-1987.69,1609.95 ccw(c-2016.84,1639.09) -1975.62,1639.09 ; R33.1@-1987.69,1609.95 ccw(c-2016.84,1639.09) -1975.62,1639.09 ; R33.1@-1987.69,1609.95 ccw(c-2016.84,1639.09) -1975.62,1639.09 ; R33.1@-1987.69,1609.95 ccw(c-2016.84,1639.09) -1975.62,1639.09 ; R33.1@-1987.69,1609.95 ccw(c-2016.84,1639.09) -1975.62,1639.09 ; R33.1@-1987.69,1609.95 ccw(c-2016.84,1639.09) -1975.62,1639.09 ; R33.1@-1987.69,1609.95 ccw(c-2016.84,1639.09) -1975.62,1639.09 ; R33.1@-1987.69,1609.95 ccw(c-2016.84,1639.09) -1975.62,1639.09 ; R33.1@-1987.69,1609.95 ccw(c-2016.84,1639.09) -1975.62,1639.09
NetR34_1: R34.1 U6.11 | length 583.4
  TopLayer w10: U6.11@-1955.62,1813.88 -1955.62,1705.93 -1880.62,1630.93 R34.1@-1880.62,1602.88 ; R34.1@-1887.69,1609.95 ccw(c-1904.76,1627.02) -1880.62,1627.02 ; R34.1@-1887.69,1609.95 ccw(c-1904.76,1627.02) -1880.62,1627.02 ; R34.1@-1887.69,1609.95 ccw(c-1904.76,1627.02) -1880.62,1627.02 ; R34.1@-1887.69,1609.95 ccw(c-1904.76,1627.02) -1880.62,1627.02 ; R34.1@-1887.69,1609.95 ccw(c-1904.76,1627.02) -1880.62,1627.02 ; R34.1@-1887.69,1609.95 ccw(c-1904.76,1627.02) -1880.62,1627.02 ; R34.1@-1887.69,1609.95 ccw(c-1904.76,1627.02) -1880.62,1627.02 ; R34.1@-1887.69,1609.95 ccw(c-1904.76,1627.02) -1880.62,1627.02 ; R34.1@-1887.69,1609.95 ccw(c-1904.76,1627.02) -1880.62,1627.02 ; -1880.62,1627.02 ccw(c-1856.48,1627.02) R34.1@-1873.55,1609.95 ; -1880.62,1627.02 ccw(c-1856.48,1627.02) R34.1@-1873.55,1609.95 ; -1880.62,1627.02 ccw(c-1856.48,1627.02) R34.1@-1873.55,1609.95 ; -1880.62,1627.02 ccw(c-1856.48,1627.02) R34.1@-1873.55,1609.95 ; -1880.62,1627.02 ccw(c-1856.48,1627.02) R34.1@-1873.55,1609.95 ; -1880.62,1627.02 ccw(c-1856.48,1627.02) R34.1@-1873.55,1609.95 ; -1880.62,1627.02 ccw(c-1856.48,1627.02) R34.1@-1873.55,1609.95 ; -1880.62,1627.02 ccw(c-1856.48,1627.02) R34.1@-1873.55,1609.95 ; -1880.62,1627.02 ccw(c-1856.48,1627.02) R34.1@-1873.55,1609.95
NetR35_1: R35.1 U7.9 | length 582.5
  TopLayer w10: R35.1@-1300.62,1607.88 -1300.62,1650.76 -1215.62,1735.76 U7.9@-1215.62,1813.88 ; R35.1@-1307.69,1614.95 ccw(c-1324.76,1632.02) -1300.62,1632.02 ; R35.1@-1307.69,1614.95 ccw(c-1324.76,1632.02) -1300.62,1632.02 ; R35.1@-1307.69,1614.95 ccw(c-1324.76,1632.02) -1300.62,1632.02 ; R35.1@-1307.69,1614.95 ccw(c-1324.76,1632.02) -1300.62,1632.02 ; R35.1@-1307.69,1614.95 ccw(c-1324.76,1632.02) -1300.62,1632.02 ; R35.1@-1307.69,1614.95 ccw(c-1324.76,1632.02) -1300.62,1632.02 ; R35.1@-1307.69,1614.95 ccw(c-1324.76,1632.02) -1300.62,1632.02 ; R35.1@-1307.69,1614.95 ccw(c-1324.76,1632.02) -1300.62,1632.02 ; R35.1@-1307.69,1614.95 ccw(c-1324.76,1632.02) -1300.62,1632.02 ; -1300.62,1632.02 ccw(c-1276.48,1632.02) R35.1@-1293.55,1614.95 ; -1300.62,1632.02 ccw(c-1276.48,1632.02) R35.1@-1293.55,1614.95 ; -1300.62,1632.02 ccw(c-1276.48,1632.02) R35.1@-1293.55,1614.95 ; -1300.62,1632.02 ccw(c-1276.48,1632.02) R35.1@-1293.55,1614.95 ; -1300.62,1632.02 ccw(c-1276.48,1632.02) R35.1@-1293.55,1614.95 ; -1300.62,1632.02 ccw(c-1276.48,1632.02) R35.1@-1293.55,1614.95 ; -1300.62,1632.02 ccw(c-1276.48,1632.02) R35.1@-1293.55,1614.95 ; -1300.62,1632.02 ccw(c-1276.48,1632.02) R35.1@-1293.55,1614.95 ; -1300.62,1632.02 ccw(c-1276.48,1632.02) R35.1@-1293.55,1614.95
NetR36_1: R36.1 U7.10 | length 499.4
  TopLayer w10: R36.1@-1200.62,1607.88 -1195.62,1612.88 U7.10@-1195.62,1813.88 ; R36.1@-1207.69,1614.95 ccw(c-1236.84,1644.09) -1195.62,1644.09 ; R36.1@-1207.69,1614.95 ccw(c-1236.84,1644.09) -1195.62,1644.09 ; R36.1@-1207.69,1614.95 ccw(c-1236.84,1644.09) -1195.62,1644.09 ; R36.1@-1207.69,1614.95 ccw(c-1236.84,1644.09) -1195.62,1644.09 ; R36.1@-1207.69,1614.95 ccw(c-1236.84,1644.09) -1195.62,1644.09 ; R36.1@-1207.69,1614.95 ccw(c-1236.84,1644.09) -1195.62,1644.09 ; R36.1@-1207.69,1614.95 ccw(c-1236.84,1644.09) -1195.62,1644.09 ; R36.1@-1207.69,1614.95 ccw(c-1236.84,1644.09) -1195.62,1644.09 ; R36.1@-1207.69,1614.95 ccw(c-1236.84,1644.09) -1195.62,1644.09
NetR37_1: R37.1 U7.11 | length 578.4
  TopLayer w10: U7.11@-1175.62,1813.88 -1175.62,1715.93 -1100.62,1640.93 R37.1@-1100.62,1607.88 ; R37.1@-1107.69,1614.95 ccw(c-1124.76,1632.02) -1100.62,1632.02 ; R37.1@-1107.69,1614.95 ccw(c-1124.76,1632.02) -1100.62,1632.02 ; R37.1@-1107.69,1614.95 ccw(c-1124.76,1632.02) -1100.62,1632.02 ; R37.1@-1107.69,1614.95 ccw(c-1124.76,1632.02) -1100.62,1632.02 ; R37.1@-1107.69,1614.95 ccw(c-1124.76,1632.02) -1100.62,1632.02 ; R37.1@-1107.69,1614.95 ccw(c-1124.76,1632.02) -1100.62,1632.02 ; R37.1@-1107.69,1614.95 ccw(c-1124.76,1632.02) -1100.62,1632.02 ; R37.1@-1107.69,1614.95 ccw(c-1124.76,1632.02) -1100.62,1632.02 ; R37.1@-1107.69,1614.95 ccw(c-1124.76,1632.02) -1100.62,1632.02 ; -1100.62,1632.02 ccw(c-1076.48,1632.02) R37.1@-1093.55,1614.95 ; -1100.62,1632.02 ccw(c-1076.48,1632.02) R37.1@-1093.55,1614.95 ; -1100.62,1632.02 ccw(c-1076.48,1632.02) R37.1@-1093.55,1614.95 ; -1100.62,1632.02 ccw(c-1076.48,1632.02) R37.1@-1093.55,1614.95 ; -1100.62,1632.02 ccw(c-1076.48,1632.02) R37.1@-1093.55,1614.95 ; -1100.62,1632.02 ccw(c-1076.48,1632.02) R37.1@-1093.55,1614.95 ; -1100.62,1632.02 ccw(c-1076.48,1632.02) R37.1@-1093.55,1614.95 ; -1100.62,1632.02 ccw(c-1076.48,1632.02) R37.1@-1093.55,1614.95 ; -1100.62,1632.02 ccw(c-1076.48,1632.02) R37.1@-1093.55,1614.95
NetR_P1_2: R_P1.2 R_P2.1 UP1.2 | length 138.1
  TopLayer w30: UP1.2@-3381.54,1053.14 -3381.54,1134.84 R_P2.1@-3380.54,1135.84 R_P1.2@-3325.54,1135.84
NetR_P3_1: R_P3.1 UP1.6 | length 87.8
  TopLayer w30: R_P3.1@-3436.54,754.84 -3436.54,835.54 UP1.6@-3431.54,840.54
NetR_P4_1: R_P4.1 R_P5.1 UP1.4 | length 111.3
  TopLayer w30: R_P4.1@-3597.54,1057.84 R_P5.1@-3542.54,1057.84 UP1.4@-3486.24,1057.84
NetRP1_2: R6.1 RP1.3 | length 1066.7
  TopLayer w10: R6.1@-3220.62,1751.88 -3154.5,1751.88 -3129.54,1776.84 -3129.54,1927.84 -3148.57,1946.88 ; RP1.3@-3184.62,1946.88 -3148.57,1946.88 ; R6.1@-3213.55,1744.81 cw(c-3196.48,1727.74) -3196.48,1751.88 ; R6.1@-3213.55,1744.81 cw(c-3196.48,1727.74) -3196.48,1751.88 ; R6.1@-3213.55,1744.81 cw(c-3196.48,1727.74) -3196.48,1751.88 ; R6.1@-3213.55,1744.81 cw(c-3196.48,1727.74) -3196.48,1751.88 ; R6.1@-3213.55,1744.81 cw(c-3196.48,1727.74) -3196.48,1751.88 ; R6.1@-3213.55,1744.81 cw(c-3196.48,1727.74) -3196.48,1751.88 ; R6.1@-3213.55,1744.81 cw(c-3196.48,1727.74) -3196.48,1751.88 ; R6.1@-3213.55,1744.81 cw(c-3196.48,1727.74) -3196.48,1751.88 ; R6.1@-3213.55,1744.81 cw(c-3196.48,1727.74) -3196.48,1751.88 ; R6.1@-3213.55,1758.95 ccw(c-3196.48,1776.02) -3196.48,1751.88 ; R6.1@-3213.55,1758.95 ccw(c-3196.48,1776.02) -3196.48,1751.88 ; R6.1@-3213.55,1758.95 ccw(c-3196.48,1776.02) -3196.48,1751.88 ; R6.1@-3213.55,1758.95 ccw(c-3196.48,1776.02) -3196.48,1751.88 ; R6.1@-3213.55,1758.95 ccw(c-3196.48,1776.02) -3196.48,1751.88 ; R6.1@-3213.55,1758.95 ccw(c-3196.48,1776.02) -3196.48,1751.88 ; R6.1@-3213.55,1758.95 ccw(c-3196.48,1776.02) -3196.48,1751.88 ; R6.1@-3213.55,1758.95 ccw(c-3196.48,1776.02) -3196.48,1751.88 ; R6.1@-3213.55,1758.95 ccw(c-3196.48,1776.02) -3196.48,1751.88 ; RP1.3@-3167.65,1936.3 cw(c-3148.58,1924.4) -3148.58,1946.88 ; RP1.3@-3167.65,1936.3 cw(c-3148.58,1924.4) -3148.58,1946.88 ; RP1.3@-3167.65,1936.3 cw(c-3148.58,1924.4) -3148.58,1946.88 ; RP1.3@-3167.65,1936.3 cw(c-3148.58,1924.4) -3148.58,1946.88 ; RP1.3@-3167.65,1936.3 cw(c-3148.58,1924.4) -3148.58,1946.88 ; RP1.3@-3167.65,1936.3 cw(c-3148.58,1924.4) -3148.58,1946.88 ; RP1.3@-3167.65,1936.3 cw(c-3148.58,1924.4) -3148.58,1946.88 ; RP1.3@-3167.65,1936.3 cw(c-3148.58,1924.4) -3148.58,1946.88 ; RP1.3@-3167.65,1936.3 cw(c-3148.58,1924.4) -3148.58,1946.88 ; RP1.3@-3167.65,1957.47 ccw(c-3148.58,1969.37) -3148.58,1946.88 ; RP1.3@-3167.65,1957.47 ccw(c-3148.58,1969.37) -3148.58,1946.88 ; RP1.3@-3167.65,1957.47 ccw(c-3148.58,1969.37) -3148.58,1946.88 ; RP1.3@-3167.65,1957.47 ccw(c-3148.58,1969.37) -3148.58,1946.88 ; RP1.3@-3167.65,1957.47 ccw(c-3148.58,1969.37) -3148.58,1946.88 ; RP1.3@-3167.65,1957.47 ccw(c-3148.58,1969.37) -3148.58,1946.88 ; RP1.3@-3167.65,1957.47 ccw(c-3148.58,1969.37) -3148.58,1946.88 ; RP1.3@-3167.65,1957.47 ccw(c-3148.58,1969.37) -3148.58,1946.88 ; RP1.3@-3167.65,1957.47 ccw(c-3148.58,1969.37) -3148.58,1946.88
NetRP2_2: R7.1 RP2.3 | length 924.5
  TopLayer w10: R7.1@-2424.54,1748.84 -2378.54,1748.84 -2351.54,1775.84 -2351.54,1917.84 -2377.54,1943.84 ; RP2.3@-2408.54,1943.84 -2377.54,1943.84 ; R7.1@-2417.46,1741.77 cw(c-2400.39,1724.7) -2400.39,1748.84 ; R7.1@-2417.46,1741.77 cw(c-2400.39,1724.7) -2400.39,1748.84 ; R7.1@-2417.46,1741.77 cw(c-2400.39,1724.7) -2400.39,1748.84 ; R7.1@-2417.46,1741.77 cw(c-2400.39,1724.7) -2400.39,1748.84 ; R7.1@-2417.46,1741.77 cw(c-2400.39,1724.7) -2400.39,1748.84 ; R7.1@-2417.46,1741.77 cw(c-2400.39,1724.7) -2400.39,1748.84 ; R7.1@-2417.46,1741.77 cw(c-2400.39,1724.7) -2400.39,1748.84 ; R7.1@-2417.46,1741.77 cw(c-2400.39,1724.7) -2400.39,1748.84 ; R7.1@-2417.46,1741.77 cw(c-2400.39,1724.7) -2400.39,1748.84 ; R7.1@-2417.46,1755.91 ccw(c-2400.39,1772.98) -2400.39,1748.84 ; R7.1@-2417.46,1755.91 ccw(c-2400.39,1772.98) -2400.39,1748.84 ; R7.1@-2417.46,1755.91 ccw(c-2400.39,1772.98) -2400.39,1748.84 ; R7.1@-2417.46,1755.91 ccw(c-2400.39,1772.98) -2400.39,1748.84 ; R7.1@-2417.46,1755.91 ccw(c-2400.39,1772.98) -2400.39,1748.84 ; R7.1@-2417.46,1755.91 ccw(c-2400.39,1772.98) -2400.39,1748.84 ; R7.1@-2417.46,1755.91 ccw(c-2400.39,1772.98) -2400.39,1748.84 ; R7.1@-2417.46,1755.91 ccw(c-2400.39,1772.98) -2400.39,1748.84 ; R7.1@-2417.46,1755.91 ccw(c-2400.39,1772.98) -2400.39,1748.84 ; RP2.3@-2390.31,1935.6 cw(c-2377.54,1929.82) -2377.54,1943.84 ; RP2.3@-2390.31,1935.6 cw(c-2377.54,1929.82) -2377.54,1943.84 ; RP2.3@-2390.31,1935.6 cw(c-2377.54,1929.82) -2377.54,1943.84 ; RP2.3@-2390.31,1935.6 cw(c-2377.54,1929.82) -2377.54,1943.84 ; RP2.3@-2390.31,1935.6 cw(c-2377.54,1929.82) -2377.54,1943.84 ; RP2.3@-2390.31,1935.6 cw(c-2377.54,1929.82) -2377.54,1943.84 ; RP2.3@-2390.31,1935.6 cw(c-2377.54,1929.82) -2377.54,1943.84 ; RP2.3@-2390.31,1935.6 cw(c-2377.54,1929.82) -2377.54,1943.84 ; RP2.3@-2390.31,1935.6 cw(c-2377.54,1929.82) -2377.54,1943.84 ; RP2.3@-2390.31,1952.09 ccw(c-2377.54,1957.87) -2377.54,1943.84 ; RP2.3@-2390.31,1952.09 ccw(c-2377.54,1957.87) -2377.54,1943.84 ; RP2.3@-2390.31,1952.09 ccw(c-2377.54,1957.87) -2377.54,1943.84 ; RP2.3@-2390.31,1952.09 ccw(c-2377.54,1957.87) -2377.54,1943.84 ; RP2.3@-2390.31,1952.09 ccw(c-2377.54,1957.87) -2377.54,1943.84 ; RP2.3@-2390.31,1952.09 ccw(c-2377.54,1957.87) -2377.54,1943.84 ; RP2.3@-2390.31,1952.09 ccw(c-2377.54,1957.87) -2377.54,1943.84 ; RP2.3@-2390.31,1952.09 ccw(c-2377.54,1957.87) -2377.54,1943.84 ; RP2.3@-2390.31,1952.09 ccw(c-2377.54,1957.87) -2377.54,1943.84
NetRP3_2: R8.1 RP3.3 | length 1708.9
  TopLayer w10: R8.1@-1615.62,1751.88 -1570.5,1751.88 -1543.54,1778.84 -1543.54,1917.84 -1572.57,1946.88 ; RP3.3@-1600.93,1956.8 cw(c-1596.57,1923.77) -1573.02,1947.32 ; RP3.3@-1598.32,1936.97 cw(c-1589.89,1873.11) -1544.35,1918.66 ; -1558.68,1932.99 ccw(c-1593.23,1898.44) RP3.3@-1599.62,1946.88 ; R8.1@-1608.55,1744.81 cw(c-1591.48,1727.74) -1591.48,1751.88 ; R8.1@-1608.55,1744.81 cw(c-1591.48,1727.74) -1591.48,1751.88 ; R8.1@-1608.55,1744.81 cw(c-1591.48,1727.74) -1591.48,1751.88 ; R8.1@-1608.55,1744.81 cw(c-1591.48,1727.74) -1591.48,1751.88 ; R8.1@-1608.55,1744.81 cw(c-1591.48,1727.74) -1591.48,1751.88 ; R8.1@-1608.55,1744.81 cw(c-1591.48,1727.74) -1591.48,1751.88 ; R8.1@-1608.55,1744.81 cw(c-1591.48,1727.74) -1591.48,1751.88 ; R8.1@-1608.55,1744.81 cw(c-1591.48,1727.74) -1591.48,1751.88 ; R8.1@-1608.55,1744.81 cw(c-1591.48,1727.74) -1591.48,1751.88 ; R8.1@-1608.55,1758.95 ccw(c-1591.48,1776.02) -1591.48,1751.88 ; R8.1@-1608.55,1758.95 ccw(c-1591.48,1776.02) -1591.48,1751.88 ; R8.1@-1608.55,1758.95 ccw(c-1591.48,1776.02) -1591.48,1751.88 ; R8.1@-1608.55,1758.95 ccw(c-1591.48,1776.02) -1591.48,1751.88 ; R8.1@-1608.55,1758.95 ccw(c-1591.48,1776.02) -1591.48,1751.88 ; R8.1@-1608.55,1758.95 ccw(c-1591.48,1776.02) -1591.48,1751.88 ; R8.1@-1608.55,1758.95 ccw(c-1591.48,1776.02) -1591.48,1751.88 ; R8.1@-1608.55,1758.95 ccw(c-1591.48,1776.02) -1591.48,1751.88 ; R8.1@-1608.55,1758.95 ccw(c-1591.48,1776.02) -1591.48,1751.88 ; RP3.3@-1599.62,1946.88 cw(c-1586.12,1932) -1571.9,1946.21 ; RP3.3@-1599.62,1946.88 cw(c-1586.12,1932) -1571.9,1946.21 ; RP3.3@-1599.62,1946.88 cw(c-1586.12,1932) -1571.9,1946.21 ; RP3.3@-1599.62,1946.88 cw(c-1586.12,1932) -1571.9,1946.21 ; RP3.3@-1599.62,1946.88 cw(c-1586.12,1932) -1571.9,1946.21 ; RP3.3@-1599.62,1946.88 cw(c-1586.12,1932) -1571.9,1946.21 ; RP3.3@-1599.62,1946.88 cw(c-1586.12,1932) -1571.9,1946.21 ; RP3.3@-1599.62,1946.88 cw(c-1586.12,1932) -1571.9,1946.21 ; RP3.3@-1599.62,1946.88 -1572.57,1946.88 ; RP3.3@-1592.9,1939.48 cw(c-1579.05,1924.22) -1564.48,1938.79 ; RP3.3@-1592.9,1939.48 cw(c-1579.05,1924.22) -1564.48,1938.79 ; RP3.3@-1592.9,1939.48 cw(c-1579.05,1924.22) -1564.48,1938.79 ; RP3.3@-1592.9,1939.48 cw(c-1579.05,1924.22) -1564.48,1938.79 ; RP3.3@-1592.9,1939.48 cw(c-1579.05,1924.22) -1564.48,1938.79 ; RP3.3@-1592.9,1939.48 cw(c-1579.05,1924.22) -1564.48,1938.79 ; RP3.3@-1592.9,1939.48 cw(c-1579.05,1924.22) -1564.48,1938.79 ; RP3.3@-1592.9,1939.48 cw(c-1579.05,1924.22) -1564.48,1938.79 ; RP3.3@-1586.18,1932.07 cw(c-1571.99,1916.44) -1557.06,1931.37 ; RP3.3@-1586.18,1932.07 cw(c-1571.99,1916.44) -1557.06,1931.37 ; RP3.3@-1586.18,1932.07 cw(c-1571.99,1916.44) -1557.06,1931.37 ; RP3.3@-1586.18,1932.07 cw(c-1571.99,1916.44) -1557.06,1931.37 ; RP3.3@-1586.18,1932.07 cw(c-1571.99,1916.44) -1557.06,1931.37 ; RP3.3@-1586.18,1932.07 cw(c-1571.99,1916.44) -1557.06,1931.37 ; RP3.3@-1586.18,1932.07 cw(c-1571.99,1916.44) -1557.06,1931.37 ; RP3.3@-1586.18,1932.07 cw(c-1571.99,1916.44) -1557.06,1931.37 ; RP3.3@-1580.5,1941.02 cw(c-1572.58,1938.59) -1572.58,1946.88 ; RP3.3@-1580.5,1941.02 cw(c-1572.58,1938.59) -1572.58,1946.88 ; RP3.3@-1580.5,1941.02 cw(c-1572.58,1938.59) -1572.58,1946.88 ; RP3.3@-1580.5,1941.02 cw(c-1572.58,1938.59) -1572.58,1946.88 ; RP3.3@-1580.5,1941.02 cw(c-1572.58,1938.59) -1572.58,1946.88 ; RP3.3@-1580.5,1941.02 cw(c-1572.58,1938.59) -1572.58,1946.88 ; RP3.3@-1580.5,1941.02 cw(c-1572.58,1938.59) -1572.58,1946.88 ; RP3.3@-1580.5,1941.02 cw(c-1572.58,1938.59) -1572.58,1946.88 ; RP3.3@-1580.5,1941.02 cw(c-1572.58,1938.59) -1572.58,1946.88 ; RP3.3@-1580.5,1952.74 ccw(c-1572.58,1955.17) -1572.58,1946.88 ; RP3.3@-1580.5,1952.74 ccw(c-1572.58,1955.17) -1572.58,1946.88 ; RP3.3@-1580.5,1952.74 ccw(c-1572.58,1955.17) -1572.58,1946.88 ; RP3.3@-1580.5,1952.74 ccw(c-1572.58,1955.17) -1572.58,1946.88 ; RP3.3@-1580.5,1952.74 ccw(c-1572.58,1955.17) -1572.58,1946.88 ; RP3.3@-1580.5,1952.74 ccw(c-1572.58,1955.17) -1572.58,1946.88 ; RP3.3@-1580.5,1952.74 ccw(c-1572.58,1955.17) -1572.58,1946.88 ; RP3.3@-1580.5,1952.74 ccw(c-1572.58,1955.17) -1572.58,1946.88 ; RP3.3@-1580.5,1952.74 ccw(c-1572.58,1955.17) -1572.58,1946.88
NetRP4_2: R9.1 RP4.3 | length 1322.2
  TopLayer w10: RP4.3@-858.54,1948.84 -807.54,1948.84 -783.54,1924.84 -783.54,1771.84 -803.5,1751.88 R9.1@-835.62,1751.88 ; RP4.3@-844.39,1934.7 cw(c-810.25,1900.56) -810.25,1948.84 ; RP4.3@-844.39,1934.7 cw(c-810.25,1900.56) -810.25,1948.84 ; RP4.3@-844.39,1934.7 cw(c-810.25,1900.56) -810.25,1948.84 ; RP4.3@-844.39,1934.7 cw(c-810.25,1900.56) -810.25,1948.84 ; RP4.3@-844.39,1934.7 cw(c-810.25,1900.56) -810.25,1948.84 ; RP4.3@-844.39,1934.7 cw(c-810.25,1900.56) -810.25,1948.84 ; RP4.3@-844.39,1934.7 cw(c-810.25,1900.56) -810.25,1948.84 ; RP4.3@-844.39,1934.7 cw(c-810.25,1900.56) -810.25,1948.84 ; RP4.3@-844.39,1934.7 cw(c-810.25,1900.56) -810.25,1948.84 ; RP4.3@-844.39,1962.98 ccw(c-810.25,1997.13) -810.25,1948.84 ; RP4.3@-844.39,1962.98 ccw(c-810.25,1997.13) -810.25,1948.84 ; RP4.3@-844.39,1962.98 ccw(c-810.25,1997.13) -810.25,1948.84 ; RP4.3@-844.39,1962.98 ccw(c-810.25,1997.13) -810.25,1948.84 ; RP4.3@-844.39,1962.98 ccw(c-810.25,1997.13) -810.25,1948.84 ; RP4.3@-844.39,1962.98 ccw(c-810.25,1997.13) -810.25,1948.84 ; RP4.3@-844.39,1962.98 ccw(c-810.25,1997.13) -810.25,1948.84 ; RP4.3@-844.39,1962.98 ccw(c-810.25,1997.13) -810.25,1948.84 ; RP4.3@-844.39,1962.98 ccw(c-810.25,1997.13) -810.25,1948.84 ; R9.1@-828.55,1744.81 cw(c-811.48,1727.74) -811.48,1751.88 ; R9.1@-828.55,1744.81 cw(c-811.48,1727.74) -811.48,1751.88 ; R9.1@-828.55,1744.81 cw(c-811.48,1727.74) -811.48,1751.88 ; R9.1@-828.55,1744.81 cw(c-811.48,1727.74) -811.48,1751.88 ; R9.1@-828.55,1744.81 cw(c-811.48,1727.74) -811.48,1751.88 ; R9.1@-828.55,1744.81 cw(c-811.48,1727.74) -811.48,1751.88 ; R9.1@-828.55,1744.81 cw(c-811.48,1727.74) -811.48,1751.88 ; R9.1@-828.55,1744.81 cw(c-811.48,1727.74) -811.48,1751.88 ; R9.1@-828.55,1744.81 cw(c-811.48,1727.74) -811.48,1751.88 ; R9.1@-828.55,1758.95 ccw(c-811.48,1776.02) -811.48,1751.88 ; R9.1@-828.55,1758.95 ccw(c-811.48,1776.02) -811.48,1751.88 ; R9.1@-828.55,1758.95 ccw(c-811.48,1776.02) -811.48,1751.88 ; R9.1@-828.55,1758.95 ccw(c-811.48,1776.02) -811.48,1751.88 ; R9.1@-828.55,1758.95 ccw(c-811.48,1776.02) -811.48,1751.88 ; R9.1@-828.55,1758.95 ccw(c-811.48,1776.02) -811.48,1751.88 ; R9.1@-828.55,1758.95 ccw(c-811.48,1776.02) -811.48,1751.88 ; R9.1@-828.55,1758.95 ccw(c-811.48,1776.02) -811.48,1751.88 ; R9.1@-828.55,1758.95 ccw(c-811.48,1776.02) -811.48,1751.88
NetU2_2: TF.3 U2.17 | length 573.5
  TopLayer w10: U2.17@-663.54,1961.84 -663.54,2380.84 -649.54,2394.84 TF.3@-575.54,2394.84 ; -615.85,2394.84 cw(c-615.85,2375.53) -602.19,2389.19 ccw(c-615.85,2375.53) -615.85,2394.84 ; -615.85,2394.84 ccw(c-615.85,2414.16) -602.19,2400.5 cw(c-615.85,2414.16) -615.85,2394.84
NetU2_4: TF.5 U2.16 | length 464.4
  TopLayer w10: U2.16@-637.54,1961.84 -637.54,2299.84 -628.54,2308.84 TF.5@-575.54,2308.84 ; -615.85,2308.84 cw(c-615.85,2289.53) -602.19,2303.19 ccw(c-615.85,2289.53) -615.85,2308.84 ; -615.85,2308.84 ccw(c-615.85,2328.16) -602.19,2314.5 cw(c-615.85,2328.16) -615.85,2308.84
NetU2_6: TF.2 U2.18 | length 639
  TopLayer w10: U2.18@-688.54,1961.84 -688.54,2418.84 -668.54,2438.84 TF.2@-575.54,2438.84 ; -615.85,2438.84 cw(c-615.85,2419.53) -602.19,2433.19 ccw(c-615.85,2419.53) -615.85,2438.84 ; -615.85,2438.84 ccw(c-615.85,2458.16) -602.19,2444.5 cw(c-615.85,2458.16) -615.85,2438.84
NetU3_1: U3.1 X-MOT.1 | length 1533.4
  TopLayer w10: -3739.54,2013.84 ccw(c-3721.86,2016.82) -3718.88,1999.14 ; -3729.54,2004.79 -3692.62,1967.88 U3.1@-3655.62,1967.88 ; -3723.54,2010.84 -3689.54,1976.84 ccw(c-3682.05,1975.36) -3683.54,1967.88 ; -3721.54,2011.84 -3721.54,2012.84 ; -3694.77,1982.08 ccw(c-3675.55,1987.1) U3.1@-3670.54,1967.88
  TopLayer w25: -3821.54,2476.84 -3821.54,2569.84 -3786.54,2604.84 X-MOT.1@-3714.54,2604.84 ; -3821.54,2567.02 -3821.54,2172.84 -3731.54,2082.84 -3731.54,2016.84 ; -3769.9,2604.84 cw(c-3769.9,2549.48) X-MOT.1@-3730.75,2588.63 ; -3769.9,2604.84 ccw(c-3769.9,2660.21) X-MOT.1@-3730.75,2621.06 ; -3769.9,2604.84 cw(c-3769.9,2549.48) X-MOT.1@-3730.75,2588.63 ; -3769.9,2604.84 ccw(c-3769.9,2660.21) X-MOT.1@-3730.75,2621.06 ; -3769.9,2604.84 cw(c-3769.9,2549.48) X-MOT.1@-3730.75,2588.63 ; -3769.9,2604.84 ccw(c-3769.9,2660.21) X-MOT.1@-3730.75,2621.06 ; -3769.9,2604.84 ccw(c-3769.9,2660.21) X-MOT.1@-3730.75,2621.06 ; -3769.9,2604.84 cw(c-3769.9,2549.48) X-MOT.1@-3730.75,2588.63 ; -3769.9,2604.84 ccw(c-3769.9,2660.21) X-MOT.1@-3730.75,2621.06 ; -3769.9,2604.84 cw(c-3769.9,2549.48) X-MOT.1@-3730.75,2588.63 ; -3769.9,2604.84 ccw(c-3769.9,2660.21) X-MOT.1@-3730.75,2621.06 ; -3769.9,2604.84 cw(c-3769.9,2549.48) X-MOT.1@-3730.75,2588.63
NetU3_8: C34.1 U3.8 | length 600
  TopLayer w10: C34.1@-3794.45,1649.8 -3794.45,1676.93 -3657.5,1813.88 U3.8@-3619.62,1813.88 ; C34.1@-3801.52,1656.87 ccw(c-3818.59,1673.95) -3794.45,1673.95 ; C34.1@-3801.52,1656.87 ccw(c-3818.59,1673.95) -3794.45,1673.95 ; C34.1@-3801.52,1656.87 ccw(c-3818.59,1673.95) -3794.45,1673.95 ; C34.1@-3801.52,1656.87 ccw(c-3818.59,1673.95) -3794.45,1673.95 ; C34.1@-3801.52,1656.87 ccw(c-3818.59,1673.95) -3794.45,1673.95 ; C34.1@-3801.52,1656.87 ccw(c-3818.59,1673.95) -3794.45,1673.95 ; C34.1@-3801.52,1656.87 ccw(c-3818.59,1673.95) -3794.45,1673.95 ; C34.1@-3801.52,1656.87 ccw(c-3818.59,1673.95) -3794.45,1673.95 ; C34.1@-3801.52,1656.87 ccw(c-3818.59,1673.95) -3794.45,1673.95 ; -3794.45,1673.95 ccw(c-3770.31,1673.95) C34.1@-3787.38,1656.87 ; -3794.45,1673.95 ccw(c-3770.31,1673.95) C34.1@-3787.38,1656.87 ; -3794.45,1673.95 ccw(c-3770.31,1673.95) C34.1@-3787.38,1656.87 ; -3794.45,1673.95 ccw(c-3770.31,1673.95) C34.1@-3787.38,1656.87 ; -3794.45,1673.95 ccw(c-3770.31,1673.95) C34.1@-3787.38,1656.87 ; -3794.45,1673.95 ccw(c-3770.31,1673.95) C34.1@-3787.38,1656.87 ; -3794.45,1673.95 ccw(c-3770.31,1673.95) C34.1@-3787.38,1656.87 ; -3794.45,1673.95 ccw(c-3770.31,1673.95) C34.1@-3787.38,1656.87 ; -3794.45,1673.95 ccw(c-3770.31,1673.95) C34.1@-3787.38,1656.87